# EAGLE board test (EAGLE 9.6.2)
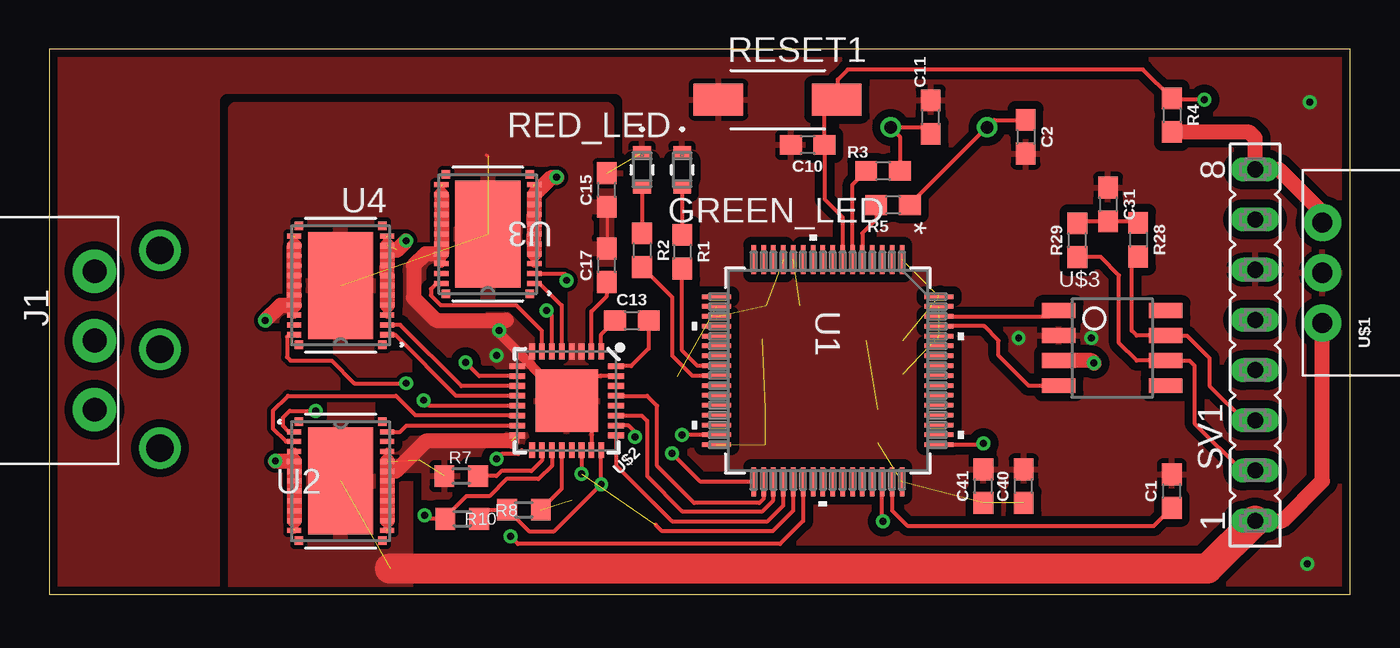
[diagram p0: board, top side]
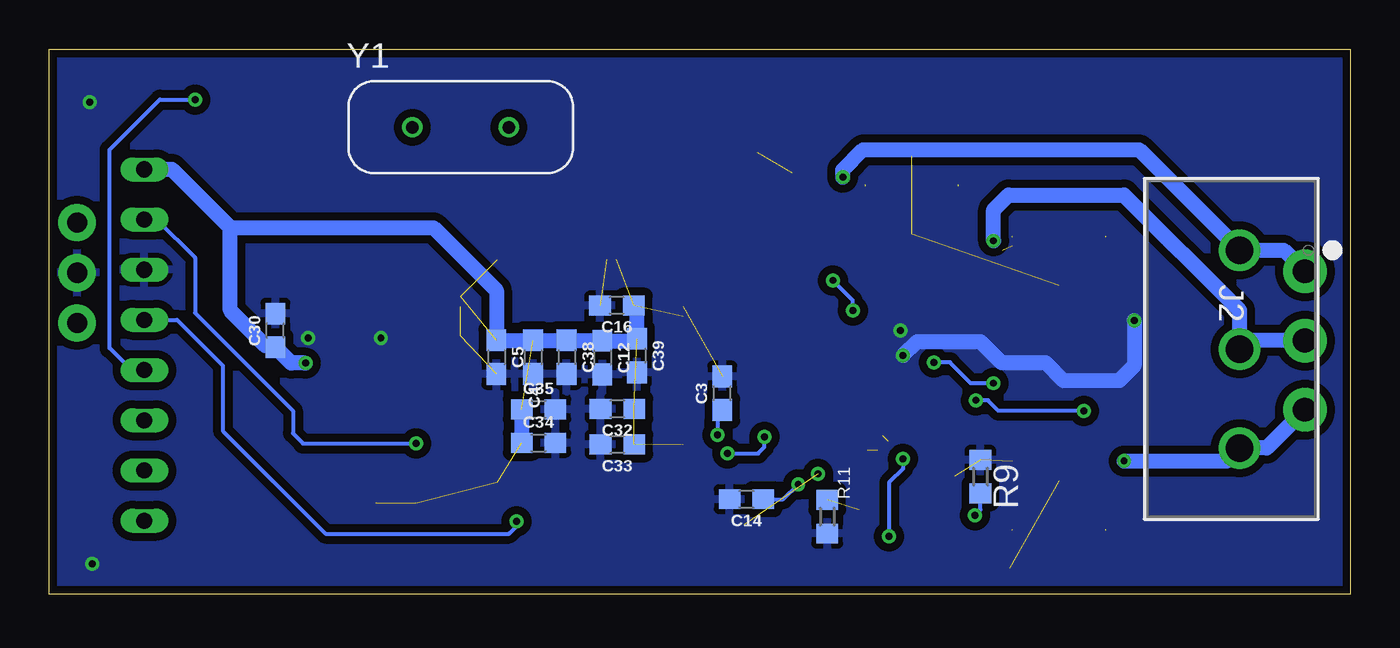
[diagram p1: board, bottom side, seen from below]

Size 65.79 x 27.56 mm. Coordinates in mm from the lower left corner, seen from the top.
Outline: 0,0 65.79,0 65.79,27.56 0,27.56 0,0
Copper layers (1*16): Top 0.0356mm / dielectric 1.5011mm / Bottom 0.0356mm
Design rules "ECE_Senior_Design": minimum track width 8mil, minimum drill 13mil, track to track 8mil, track to pad 8mil, pad to pad 6mil, via to via 8mil, smd to smd 6mil, copper to edge 15mil, drill to drill 8mil, minimum pad ring 7mil, minimum via ring 7mil, stop-mask expansion 3mil, vias tented up to drill 0mil, thermal gap 10mil
Net classes: 0 default: width 0.203 mm; 1 diff_pair: width 0.203 mm, clearance 0.203 mm

## Footprints (pad centres in the part's own frame; a part is rotated, then mirrored left to right if it is on the bottom)
0603 = smd 1.1 x 1: 1 -0.85,0; 2 0.85,0
LED_VISHAY_TLMX1100 = smd 0.66 x 0.889: 1 -0.876,0; 2 0.876,0
284512-3 = drill 1.2 pad 2.2: 1 0,3.5; 2 0,0; 3 0,-3.5
CONN_1755529 = drill 1.397 pad 1.905: 1 0,0; 2 5.004,0; 3 10.008,0
R0603 = smd 1 x 1.1: 1 -0.85,0; 2 0.85,0
DISCRETECOMPONENTS_SW_2512 = smd 2.5 x 1.6: 1 -3,0; 2 3,0
FE08 = drill 0.813 long: 1 -8.89,0; 2 -6.35,0; 3 -3.81,0; 4 -1.27,0; 5 1.27,0; 6 3.81,0; 7 6.35,0; 8 8.89,0
LQFP-64 = smd 1.473 x 0.229: 1 -5.626,3.75; 2 -5.626,3.25; 3 -5.626,2.75; 4 -5.626,2.25; 5 -5.626,1.75; 6 -5.626,1.25; 7 -5.626,0.75; 8 -5.626,0.25; 9 -5.626,-0.25; 10 -5.626,-0.75; 11 -5.626,-1.25; 12 -5.626,-1.75; 13 -5.626,-2.25; 14 -5.626,-2.75; 15 -5.626,-3.25; 16 -5.626,-3.75; 33 5.626,-3.75; 34 5.626,-3.25; 35 5.626,-2.75; 36 5.626,-2.25; 37 5.626,-1.75; 38 5.626,-1.25; 39 5.626,-0.75; 40 5.626,-0.25; 41 5.626,0.25; 42 5.626,0.75; 43 5.626,1.25; 44 5.626,1.75; 45 5.626,2.25; 46 5.626,2.75; 47 5.626,3.25; 48 5.626,3.75 | smd 0.229 x 1.473: 17 -3.75,-5.626; 18 -3.25,-5.626; 19 -2.75,-5.626; 20 -2.25,-5.626; 21 -1.75,-5.626; 22 -1.25,-5.626; 23 -0.75,-5.626; 24 -0.25,-5.626; 25 0.25,-5.626; 26 0.75,-5.626; 27 1.25,-5.626; 28 1.75,-5.626; 29 2.25,-5.626; 30 2.75,-5.626; 31 3.25,-5.626; 32 3.75,-5.626; 49 3.75,5.626; 50 3.25,5.626; 51 2.75,5.626; 52 2.25,5.626; 53 1.75,5.626; 54 1.25,5.626; 55 0.75,5.626; 56 0.25,5.626; 57 -0.25,5.626; 58 -0.75,5.626; 59 -1.25,5.626; 60 -1.75,5.626; 61 -2.25,5.626; 62 -2.75,5.626; 63 -3.25,5.626; 64 -3.75,5.626
DMM0022A = smd 0.711 x 0.254: 1 -2.35,2.5; 2 -2.35,2; 3 -2.35,1.5; 4 -2.35,1; 5 -2.35,0.5; 6 -2.35,0; 7 -2.35,-0.5; 8 -2.35,-1; 9 -2.35,-1.5; 10 -2.35,-2; 11 -2.35,-2.5; 12 2.35,-2.5; 13 2.35,-2; 14 2.35,-1.5; 15 2.35,-1; 16 2.35,-0.5; 17 2.35,0; 18 2.35,0.5; 19 2.35,1; 20 2.35,1.5; 21 2.35,2; 22 2.35,2.5 | smd 0.432 x 0.432: 23 -2.115,3.013; 24 -2.115,-3.013; 25 2.115,-3.013; 26 2.115,3.013 | smd 3.302 x 5.41: 27 0,0
MURATA-DC-DC = drill 1.016 pad 1.88: 1 -2.54,0; 2 0,0; 3 2.54,0
QFN-32-5X5MM = smd 0.285 x 0.8: 1 -1.75,-2.5; 2 -1.25,-2.5; 3 -0.75,-2.5; 4 -0.25,-2.5; 5 0.25,-2.5; 6 0.75,-2.5; 7 1.25,-2.5; 8 1.75,-2.5; 17 1.75,2.5; 18 1.25,2.5; 19 0.75,2.5; 20 0.25,2.5; 21 -0.25,2.5; 22 -0.75,2.5; 23 -1.25,2.5; 24 -1.75,2.5 | smd 0.8 x 0.285: 9 2.5,-1.75; 10 2.5,-1.25; 11 2.5,-0.75; 12 2.5,-0.25; 13 2.5,0.25; 14 2.5,0.75; 15 2.5,1.25; 16 2.5,1.75; 25 -2.5,1.75; 26 -2.5,1.25; 27 -2.5,0.75; 28 -2.5,0.25; 29 -2.5,-0.25; 30 -2.5,-0.75; 31 -2.5,-1.25; 32 -2.5,-1.75 | smd 3.15 x 3.15: EP 0,0
SOIC-8 = smd 1.7 x 0.75: 1 0,3.81; 2 0,2.54; 3 0,1.27; 4 0,0; 5 5.4,0; 6 5.4,1.27; 7 5.4,2.54; 8 5.4,3.81
XTAL_ECS-80-S-4X = drill 0.63 pad 1.03: 1 -2.44,0; 2 2.44,0

## Placement (x,y rotation side)
C1  2.2uF  [0603]  56.77,5.21 90 top
C2  20pF  [0603]  49.38,23.14 270 top
C3  2.2uF  [0603]  31.75,10.16 90 bottom
C4  4.7uF  [0603]  41.33,11.99 270 bottom
C5  4.7uF  [0603]  43.18,11.99 270 bottom
C10  0.1uF  [0603]  38.35,22.73 180 top
C11  20[F  [0603]  44.58,24.13 90 top
C12  4.7uF  [0603]  37.82,11.96 270 bottom
C13  47nF  [0603]  29.46,13.84 0 top
C14  1.0uF  [0603]  30.53,4.8 180 bottom
C15  0.1uF  [0603]  28.19,20.45 90 top
C16  4.7uF  [0603]  37.08,14.61 180 bottom
C17  1.0uF  [0603]  28.19,16.64 90 top
C30  0.1IuF  [0603]  54.36,13.34 90 bottom
C31  0.1uF  [0603]  53.54,19.71 270 top
C32  4.7uF  [0603]  37.06,9.37 180 bottom
C33  4.7uF  [0603]  37.06,7.57 180 bottom
C34  4.7uF  [0603]  41.05,7.65 0 bottom
C35  4.7uF  [0603]  41.05,9.35 0 bottom
C38  4.7uF  [0603]  39.62,11.99 270 bottom
C39  4.7uF  [0603]  36.07,12.06 270 bottom
C40  4.7uF  [0603]  49.28,5.46 90 top
C41  4.7uF  [0603]  47.24,5.46 90 top
GREEN_LED  TLMS1100-GS08  [LED_VISHAY_TLMX1100]  32,21.46 270 top
J1  284512-3  [284512-3]  2.29,12.83 180 top
J2  1755529  [CONN_1755529]  5.59,17.4 270 bottom
R1  470  [0603]  32,17.32 270 top
R2  470  [0603]  29.97,17.4 270 top
R3  0  [0603]  42.16,21.41 180 top
R4  10k  [0603]  56.77,24.23 270 top
R5  0  [0603]  42.67,19.68 180 top
R7  47k  [R0603]  20.83,5.97 0 top
R8  [R0603]  20.88,3.81 0 top
R9  [R0603]  18.69,5.94 270 bottom
R10  [R0603]  24,4.27 180 top
R11  [R0603]  26.44,3.91 90 bottom
R28  60  [0603]  55.07,17.93 270 top
R29  60  [0603]  51.99,17.91 90 top
RED_LED  TLMS1100-GS08  [LED_VISHAY_TLMX1100]  29.97,21.46 270 top
RESET1  [DISCRETECOMPONENTS_SW_2512]  36.83,25.02 0 top
SV1  [FE08]  60.99,12.6 90 top
U1  STM32F405RGT6  [LQFP-64]  39.37,11.3 270 top
U2  CSD88584Q5DCT  [DMM0022A]  14.73,5.71 0 top
U3  CSD88584Q5DCT  [DMM0022A]  22.17,18.21 180 top
U4  CSD88584Q5DCT  [DMM0022A]  14.73,15.62 180 top
U$1  MURATA-DC-DC  [MURATA-DC-DC]  64.39,16.26 90 top
U$2  DRV8320H  [QFN-32-5X5MM]  26.16,9.78 180 top
U$3  TCAN337D  [SOIC-8]  51.05,10.54 0 top
Y1  ECS-80-S-4X  [XTAL_ECS-80-S-4X]  44.98,23.62 0 bottom

## Library data of the parts
C1 C3 = SparkFun-Capacitors; PROD_ID: CAP-07888
C2 C4 C5 C10-C12 C16 C30 C32-C35 C38-C41 = SparkFun-Capacitors; PROD_ID: CAP-08280
C13 = SparkFun-Capacitors; PROD_ID: CAP-08605
C14 C17 = SparkFun-Capacitors; PROD_ID: CAP-00868
C15 C31 = SparkFun-Capacitors; PROD_ID: CAP-00810
GREEN_LED RED_LED = VESC_SHIT; MANUFACTURER_PART_NUMBER: TLMS1100GS08; VENDOR: Vishay
J1 = ThrusterConnector
J2 = VESC_SHIT; MANUFACTURER_PART_NUMBER: 1755529; VENDOR: Phoenix Contact
R1-R5 R28 R29 = SparkFun-Resistors; PROD_ID: RES-07856
R7-R11 = rcl; SPICEPREFIX: R
RESET1 = Push button - FSM2JMTR
SV1 = con-lsta; OC_FARNELL: unknown; OC_NEWARK: unknown
U1 = VESC_SHIT; MANUFACTURER_PART_NUMBER: STM32F405RGT6; VENDOR: STMicroelectronics
U2-U4 = VESC_SHIT; MANUFACTURER_PART_NUMBER: CSD88584Q5DCT; VENDOR: Texas Instruments
U$1 = MURATA_3pin_dcdc
U$2 = VESC_SHIT
U$3 = STM and CAN parts
Y1 = ECS-80-S-4X; DESCRIPTION: Crystal 8MHz Series 2-Pin HC-49/U; DIGI-KEY_PART_NUMBER: X1057-ND; DIGI-KEY_PURCHASE_URL: https://www.digikey.com/product-detail/en/ecs-inc/ECS-80-S-4X/X1057-ND/827549?utm_source=snapeda&utm_medium=aggregator&utm_campaign=symbol; MF: ECS International; MP: ECS-80-S-4X; PACKAGE: HC-49/US ECS International

## Nets
3V3: C4.1 C5.1 C12.1 C16.1 C30.1 C32.1 C33.1 C34.1 C35.1 C38.1 C39.1 C40.1 C41.1 R4.2 SV1.8 U1.1 U1.13 U1.19 U1.32 U1.48 U1.64 U$1.3 U$3.3
12V: C15.1 C17.2 SV1.1 U2.27 U3.27 U4.27 U$1.1 U$2.3 U$2.4
CAN_H [diff_pair]: R28.2 SV1.3 U$3.7
CAN_L [diff_pair]: R29.1 SV1.2 U$3.6
CAN_RX: U1.61 U$3.4
CAN_TX: U1.62 U$3.1
DVDD_1: C14.1 R8.2 R10.2 U$2.24
EN_1: U1.37 U$2.22
FAULT_1: U1.38 U$2.17
GHA_1: U3.1 U$2.5
GHB_1: U4.1 U$2.12
GHC_1: U2.1 U$2.13
GLA_1: U3.22 U$2.7
GLB_1: U4.22 U$2.10
GLC_1: U2.22 U$2.15
GND: C1.2 C2.2 C3.2 C4.2 C5.2 C10.2 C11.2 C12.2 C14.2 C15.2 C16.2 C30.2 C31.1 C32.2 C33.2 C34.2 C35.2 C38.2 C39.2 C40.2 C41.2 GREEN_LED.1 R7.1 R9.1 R11.1 RED_LED.1 RESET1.1 SV1.6 U1.12 U1.18 U1.60 U1.63 U2.12 U2.13 U2.14 U2.15 U2.16 U2.17 U2.18 U2.19 U2.20 U3.12 U3.13 U3.14 U3.15 U3.16 U3.17 U3.18 U3.19 U3.20 U4.12 U4.13 U4.14 U4.15 U4.16 U4.17 U4.18 U4.19 U4.20 U$1.2 U$2.8 U$2.9 U$2.16 U$2.23 U$2.31 U$2.EP U$3.2
INHA_1: U1.36 U$2.25
INHB_1: U1.35 U$2.27
INHC_1: U1.34 U$2.29
INL_2: U1.39
INLA_1: U1.33 U$2.26
INLB_1: U$2.28
INLC_1: U$2.30
LED1: R1.2 U1.24
LED1_MID: GREEN_LED.2 R1.1
LED2: R2.2 U1.25
LED2_MID: R2.1 RED_LED.2
N$5: C1.1 U1.47
N$6: C3.1 U1.31
N$7: C11.1 R3.1 Y1.2
N$8: C2.1 R5.1 Y1.1
N$9: C13.1 U$2.1
N$16: C13.2 U$2.32
N$17: R8.1 R9.2 U$2.19
N$18: R7.2 U$2.18
N$19: R10.1 R11.2 U$2.20
N$34: C17.1 U$2.2
N$46: C31.2 R28.1 R29.2
NRST: C10.1 R4.1 RESET1.2 SV1.4 U1.7
OSC_IN: R5.2 U1.5
OSC_OUT: R3.2 U1.6
PHASE_A1: J1.3 J2.1 U3.3 U3.4 U3.5 U3.6 U3.7 U3.8 U3.9 U3.10 U3.11
PHASE_B1: J1.2 J2.2 U4.3 U4.4 U4.5 U4.6 U4.7 U4.8 U4.9 U4.10 U4.11
PHASE_C1: J1.1 J2.3 U2.3 U2.4 U2.5 U2.6 U2.7 U2.8 U2.9 U2.10 U2.11
SHA_1: U3.2 U$2.6
SHB_1: U4.2 U$2.11
SHC_1: U2.2 U$2.14
SWCLK: SV1.7 U1.49
SWDIO: SV1.5 U1.46

## Tracks (layer width: path | path; a pad name or v marks a point on that pad's centre or on a via)
3V3  (via drill 0.35)  (11 unrouted)
  Top 0.203: 43.12,17.14 U1.1 | 45.06,15.11 U1.64
  Top 0.762: U$1.3 64.39,19.3 62.2,21.49 SV1.8 60.98,23.07 60.69,23.37 56.78,23.37 R4.2 | v52.83,11.68 52.7,11.81 U$3.3
  Bottom 0.152: 36.11,12.87 C39.1 | 36.22,14.59 C16.1
  Bottom 0.762: SV1.8 59.59,21.49 56.64,18.54 | 56.64,18.54 56.64,14.35 54.86,12.57 54.44,12.57 C30.1 53.55,11.68 v52.83,11.68 | 56.64,18.54 46.35,18.54 43.18,15.37 C5.1 C4.1 C38.1 | C38.1 39.6,12.81 | C35.1 C34.1 | C38.1 37.85,12.84 C12.1 36.17,12.81 36.11,12.87 | C39.1 36.07,14.44 36.22,14.59
12V  (3 unrouted)
  Top 0.152: C15.1 C17.2 | 22.17,22.15 22.1,22.23
  Top 0.762: SV1.1 62.38,3.71 64.39,5.71 U$1.1
  Top 1.524: SV1.1 58.57,1.29 17.22,1.29
  pour Top (rank 3): 28.19,24.51 9.4,24.51 9.4,0.38 18.03,0.38 18.03,6.73 23.11,11.81 28.19,11.81
  pour Top (no thermals): 26.29,12.06 27.05,12.06 27.05,14.48 26.29,14.48
CAN_H
  Top 0.203: R28.2 54.74,16.75 54.74,13.34 54.99,13.08 U$3.7 57.53,13.08 58.67,11.94 58.67,10.54 60.43,8.79 SV1.3
CAN_L
  Top 0.203: R29.1 53.17,17.06 54.1,16.13 54.1,12.7 54.99,11.81 U$3.6 57.66,11.81 57.91,11.56 57.91,8.64 60.3,6.25 SV1.2
CAN_RX
  Top 0.203: U1.61 47.28,13.55 48.01,12.83 48.01,12.06 49.53,10.54 U$3.4
CAN_TX
  Top 0.203: U1.62 50.58,14.05 50.88,14.35 U$3.1
DVDD_1  (via drill 0.35)
  Top 0.203: R8.2 22.19,4.27 R10.2 23.16,4.27 24.26,3.17 25.53,3.17 v27.91,5.56 U$2.24
  Bottom 0.203: C14.1 28.67,4.8 v27.91,5.56
EN_1  (via drill 0.35)  (1 unrouted)
  Top 0.203: U1.37 37.62,4.22 36.58,3.17 30.99,3.17 30.66,3.5 | U$2.22 26.92,7.27 v26.92,6.07
FAULT_1  (via drill 0.35)  (1 unrouted)
  Top 0.203: 23.9,7.28 23.71,7.09 22.87,7.09 v22.61,6.83 | U1.38 38.12,3.7 36.96,2.54 23.7,2.54 v23.32,2.92
  Bottom 0.203: v22.61,6.83 22.61,6.34 23.32,5.64 v23.32,2.92
GHA_1
  Top 0.203: U3.1 24.8,15.71 25.91,14.6 U$2.5
GHB_1
  Top 0.203: U4.1 17.49,13.12 20.58,10.03 U$2.12
GHC_1  (via drill 0.35)
  Top 0.203: U$2.13 19.2,9.53 v18.93,9.81 | v13.46,9.27 12.15,9.27 11.81,8.93 11.81,8.51 12.11,8.21 U2.1
  Bottom 0.203: v13.46,9.27 17.78,9.27 18.32,9.81 v18.93,9.81
GLA_1
  Top 0.203: U$2.7 24.91,13.31 23.62,14.61 19.81,14.61 19.3,15.11 19.3,15.44 19.57,15.71 U3.22
GLB_1  (via drill 0.35)
  Top 0.203: U4.22 12.13,13.12 12.01,13.01 12.01,11.99 12.19,11.81 14.28,11.81 15.42,10.67 v18.03,10.67 | v21.04,11.72 21.74,11.03 U$2.10
  Bottom 0.203: v18.03,10.67 19.18,10.67 20.23,11.72 v21.04,11.72
GLC_1
  Top 0.203: U2.22 17.74,8.21 18.05,8.53 U$2.15
GND  (via drill 0.35)  (11 unrouted)
  Top 0.152: U3.19 19.82,17.65 U3.18 U3.17
  Top 0.203: U$2.23 27.41,8.53 U$2.EP 26.16,10.79 26.4,11.03 U$2.31 | U$2.8 24.38,12.31
  Top 0.406: U3.13 19.82,20.65 | U3.19 U3.20 | U4.20 U4.19 | U4.13 12.38,18.06 | U2.20 U2.19 | U2.13 17.08,3.27
  Top 0.508: U$2.EP 22.73,13.21 v22.73,13.34
  Top 0.762: U3.13 U3.14 U3.15 U3.16 U3.17 19.82,17.65 | U3.18 U3.19 19.02,17.21 18.41,16.61 18.41,14.99 19.56,13.84 23.11,13.84 | U4.13 U4.14 U4.15 U4.16 U4.17 U4.18 U4.19 12.37,14.61 11.68,14.61 v10.92,13.84 | U2.19 U2.18 | U2.18 U2.17 U2.16 U2.15 U2.14 U2.13 | U2.18 17.52,6.21 19.05,7.75 23.38,7.75
  Bottom 0.762: v10.92,13.84 10.92,11.56 11.68,10.79 14.48,10.79 15.39,11.71 17.62,11.71 18.68,12.76 21.91,12.76 v22.61,12.06
  other vias: 49.02,12.95 63.63,1.52 63.75,24.89 52.7,12.95
  pour Top (isolate 0.406, rank 6): -1.02,28.32 -1.02,-0.38 67.06,-0.38 67.06,28.32
  pour Bottom (isolate 0.406): -2.03,29.08 -2.03,-0.89 68.83,-0.89 68.83,29.08
  pour Top: 23.37,8 23.88,8 23.88,7.49 23.37,7.49
  pour Top (no thermals): 24.51,11.43 24.51,12.95 23.24,14.22 22.1,14.22 22.1,11.94 22.48,11.56 22.61,11.43
INHA_1
  Top 0.203: U$2.25 28.66,6.52 31.5,3.68 36.32,3.68 37.12,4.48 U1.36
INHB_1
  Top 0.203: U$2.27 29.96,9.03 30.23,8.76 30.23,5.97 32,4.19 36.07,4.19 36.62,4.74 U1.35
INHC_1
  Top 0.203: U$2.29 30.23,10.03 30.73,9.53 30.73,6.48 32.61,4.61 35.91,4.61 36.12,4.82 U1.34
INLA_1  (via drill 0.35)
  Top 0.203: v31.5,7.11 32.93,5.68 U1.33 | v29.62,7.95 29.62,8.19 29.28,8.53 U$2.26
  Bottom 0.203: v31.5,7.11 29.95,7.11 29.62,7.44 v29.62,7.95
LED1
  Top 0.203: U1.24 32.77,11.55 32,12.32 R1.2
LED1_MID
  Top 0.203: GREEN_LED.2 R1.1
LED2
  Top 0.203: R2.2 31.5,15.03 31.5,12.06 32.51,11.05 U1.25
LED2_MID
  Top 0.203: RED_LED.2 R2.1
N$5
  Top 0.203: U1.47 42.62,4.24 43.43,3.43 55.84,3.43 C1.1
N$6  (via drill 0.35)
  Top 0.203: U1.31 v31.99,8.05
  Bottom 0.203: C3.1 31.99,9.07 v31.99,8.05
N$7
  Top 0.203: C11.1 44.23,23.62 Y1.2 43.01,23.15 R3.1
N$8
  Top 0.203: C2.1 47.79,23.99 Y1.1 43.52,19.72 R5.1
N$9
  Top 0.203: U$2.1 27.91,13.14 C13.1
N$16
  Top 0.203: C13.2 30.31,12.42 29.42,11.53 U$2.32
N$17  (via drill 0.35)
  Top 0.203: v18.97,3.99 19.15,3.81 R8.1 20.03,3.9 21.08,4.95 22.25,4.95 23.11,5.82 24.74,5.82 25.41,6.49 U$2.19
  Bottom 0.203: v18.97,3.99 18.69,4.27 R9.2
N$18
  Top 0.203: U$2.18 24.91,6.76 24.37,6.22 22.86,6.22 22.61,5.97 R7.2
N$19  (1 unrouted)
  Top 0.203: R10.1 25.91,5.33 U$2.20
N$34
  Top 0.203: U$2.2 27.41,14.31 28.19,15.09 C17.1
N$46
  Top 0.203: R29.2 52.1,18.86 C31.2 54.99,18.86 R28.1
NRST  (via drill 0.35)
  Top 0.203: U1.7 40.12,19.06 39.2,19.98 C10.1 39.2,24.39 RESET1.2 39.88,25.07 39.88,26.04 40.39,26.54 54.86,26.54 55.31,26.54 R4.1 56.83,25.02 v58.42,25.02
  Bottom 0.203: SV1.4 61.62,11.33 62.74,12.45 62.74,22.48 60.2,25.02 v58.42,25.02
OSC_IN
  Top 0.203: R5.2 41.82,18.96 41.12,18.26 U1.5
OSC_OUT
  Top 0.203: U1.6 40.62,20.72 R3.2
PHASE_A1  (via drill 0.35)  (1 unrouted)
  Top 0.406: U3.4 U3.3 | U3.10 24.52,20.65
  Top 0.762: v25.65,21.09 25.4,21.09 U3.10 U3.9 U3.8 U3.7 U3.6 U3.5 U3.4
  Bottom 0.762: v25.65,21.09 25.65,21.46 24.64,22.48 10.67,22.48 J2.1 3.36,17.4 J1.3
PHASE_B1  (via drill 0.35)  (2 unrouted)
  Top 0.406: U4.3 U4.4 | U4.10 17.08,18.06
  Top 0.762: 17.58,17.4 17.58,17.42 v18.03,17.87 | U4.10 U4.9 U4.8 U4.7 U4.6 U4.5 U4.4
  Bottom 0.762: v18.03,17.87 18.03,19.43 17.27,20.19 11.43,20.19 5.59,14.35 J2.2 5.16,12.83 J1.2
PHASE_C1  (via drill 0.35)  (1 unrouted)
  Top 0.406: U2.4 U2.3 | U2.10 12.38,3.27
  Top 0.762: U2.6 U2.5 U2.4 11.45,6.71 v11.43,6.73 | U2.6 U2.7 | U2.6 U2.8 | U2.6 U2.9 U2.10
  Bottom 0.762: v11.43,6.73 6.25,6.73 J2.3 4.22,7.39 J1.1
SHA_1  (via drill 0.35)
  Top 0.203: U3.2 26.08,16.21 26.16,16.13 v26.16,15.88 | U$2.6 25.41,14.09 v25.15,14.35
  Bottom 0.203: v25.15,14.35 25.15,14.86 v26.16,15.88
SHB_1
  Top 0.203: U$2.11 20.84,10.53 17.75,13.62 U4.2
SHC_1
  Top 0.203: U$2.14 23.23,9.03 23.21,9.04 18.52,9.04 17.53,10.03 12.06,10.03 11.3,9.27 11.3,8.38 11.97,7.71 U2.2
SWCLK  (via drill 0.35)
  Top 0.203: v47.24,7.62 47.18,7.55 U1.49
  Bottom 0.203: SV1.7 60.35,18.95 58.42,17.02 58.42,14.22 53.47,9.27 53.47,8.13 52.96,7.62 v47.24,7.62
SWDIO  (via drill 0.35)
  Top 0.203: v42.16,3.68 42.12,3.73 U1.46
  Bottom 0.203: SV1.5 59.33,13.87 57.02,11.56 57.02,8.25 51.82,3.05 42.55,3.05 42.16,3.43 v42.16,3.68